# EAGLE board SCM-140-ADSR-IO (EAGLE 7.5.0)
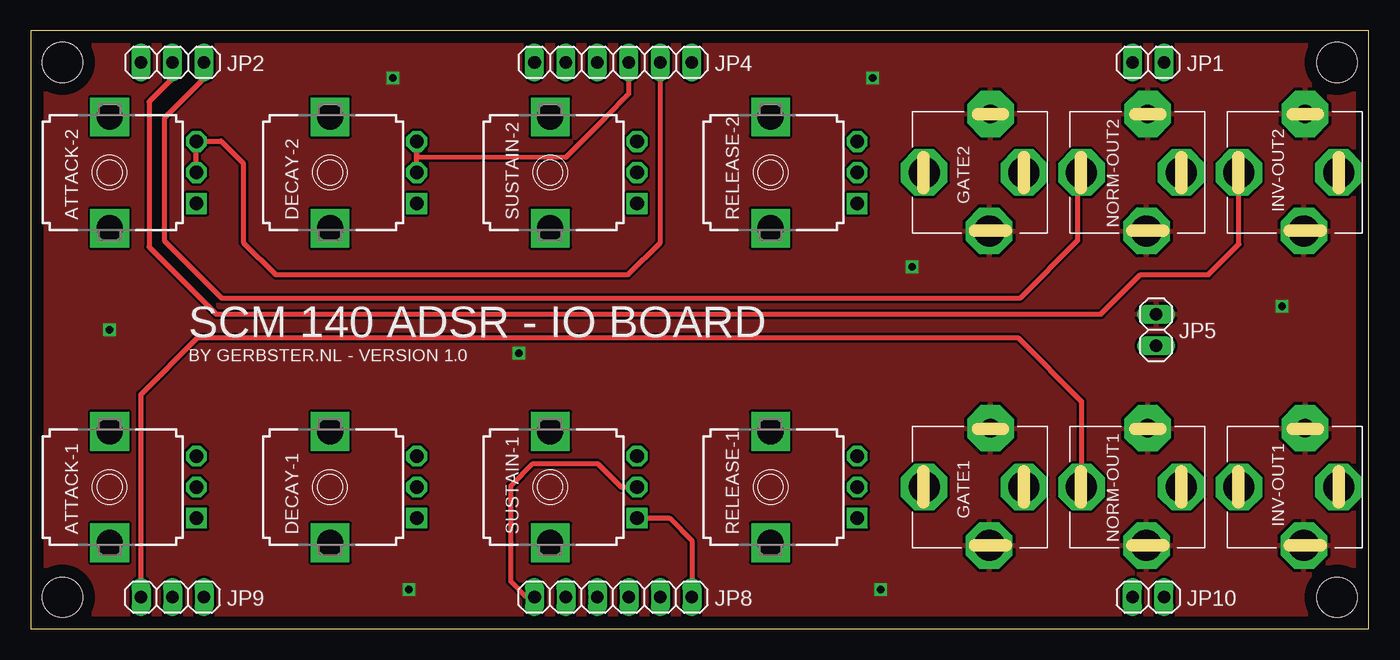
[diagram p0: board, top side]
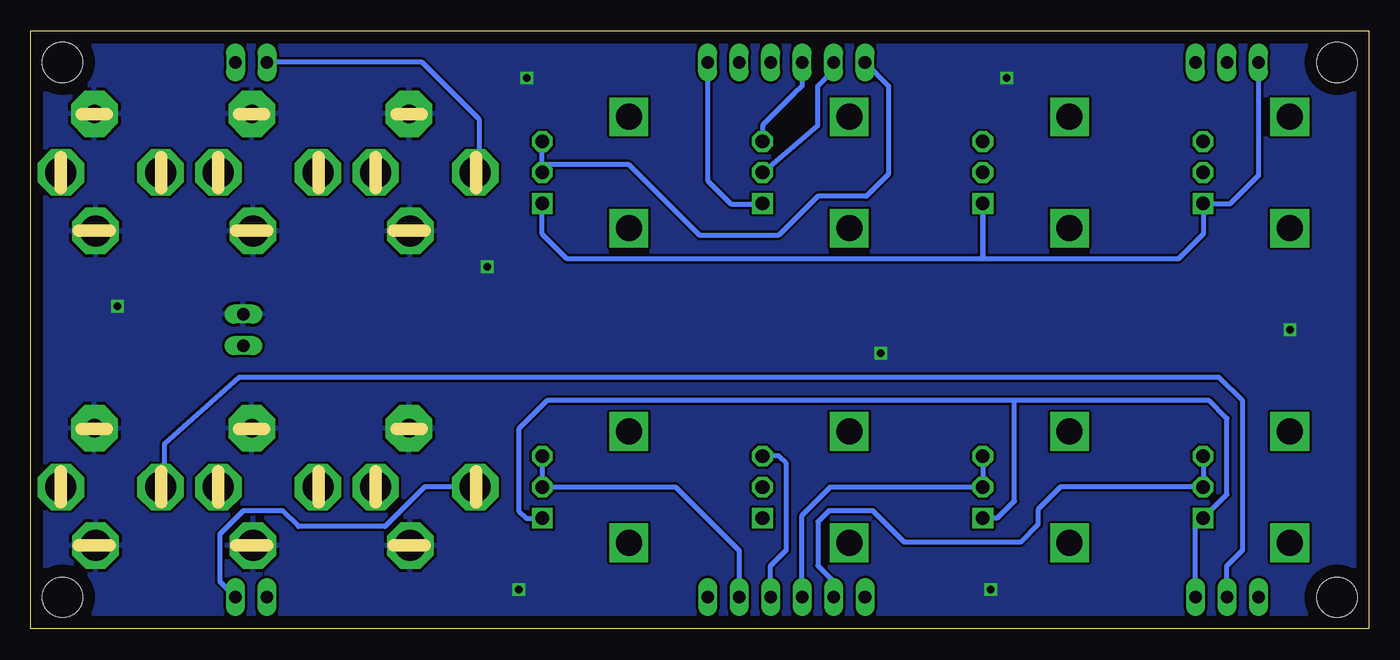
[diagram p1: board, bottom side, seen from below]

Size 107.95 x 48.26 mm. Coordinates in mm from the lower left corner, seen from the top.
Outline: 0,0 107.95,0 107.95,48.26 0,48.26 0,0
Copper layers (1*16): Top 0.035mm / dielectric 1.5mm / Bottom 0.035mm
Design rules "default": minimum track width 10mil, minimum drill 24mil, track to track 8mil, track to pad 8mil, pad to pad 8mil, via to via 8mil, smd to smd 8mil, copper to edge 40mil, drill to drill 8mil, minimum pad ring 10mil, minimum via ring 8mil, stop-mask expansion 4mil, vias tented up to drill 0mil, thermal gap 10mil
Holes 3.21 mm at 2.54,2.54 2.54,45.72 105.41,45.72 105.41,2.54

## Footprints (pad centres in the part's own frame; a part is rotated, then mirrored left to right if it is on the bottom)
EVUF = drill 1.1 pad 1.676 square: 1 -2.5,-7 | drill 1.1 pad 1.676 octagon: 2 0,-7; 3 2.5,-7 | drill 2.1 pad 2.8 square: M1 4.5,0; M2 -4.5,0
PJ301BM = drill 2.5 pad 3.75 octagon: GND1 -4.719,-0.5; SWITCH 0,-3.3; TIP 0,4.746 | drill 1.5 pad 3.75 octagon: GND2 4.746,-0.6
1X02 = drill 1.016 long: 1 -1.27,0; 2 1.27,0
1X03 = drill 1.016 long: 1 -2.54,0; 2 0,0; 3 2.54,0
1X06 = drill 1.016 long: 1 -6.35,0; 2 -3.81,0; 3 -1.27,0; 4 1.27,0; 5 3.81,0; 6 6.35,0

## Placement (x,y rotation side)
ATTACK-1  100k  [EVUF]  6.35,11.43 90 top
ATTACK-2  100k  [EVUF]  6.35,36.83 90 top
DECAY-1  1M  [EVUF]  24.13,11.43 90 top
DECAY-2  1M  [EVUF]  24.13,36.83 90 top
GATE1  Input 1  [PJ301BM]  76.83,11.43 90 top
GATE2  Input 2  [PJ301BM]  76.83,36.83 90 top
INV-OUT1  Output Inv 2  [PJ301BM]  102.23,11.43 90 top
INV-OUT2  Output Inv 2  [PJ301BM]  102.23,36.83 90 top
JP1  [1X02]  90.17,45.72 180 top
JP2  [1X03]  11.43,45.72 0 top
JP4  [1X06]  46.99,45.72 0 top
JP5  [1X02]  90.81,24.13 270 top
JP8  [1X06]  46.99,2.54 180 top
JP9  [1X03]  11.43,2.54 180 top
JP10  [1X02]  90.17,2.54 0 top
NORM-OUT1  Output 1  [PJ301BM]  89.53,11.43 90 top
NORM-OUT2  Output 2  [PJ301BM]  89.53,36.83 90 top
RELEASE-1  1M  [EVUF]  59.69,11.43 90 top
RELEASE-2  1M  [EVUF]  59.69,36.83 90 top
SUSTAIN-1  500k  [EVUF]  41.91,11.43 90 top
SUSTAIN-2  500k  [EVUF]  41.91,36.83 90 top

## Library data of the parts
ATTACK-1 ATTACK-2 DECAY-1 DECAY-2 RELEASE-1 RELEASE-2 SUSTAIN-1 SUSTAIN-2 = TomW
GATE1 GATE2 INV-OUT1 INV-OUT2 NORM-OUT1 NORM-OUT2 = gerbster
JP1 JP2 JP4 JP5 JP8-JP10 = pinhead

## Nets
+12V: JP5.2
A1-IN: ATTACK-1.2 ATTACK-1.3 JP8.5
A2-IN: ATTACK-2.2 ATTACK-2.3 JP4.5
C1-OUT: ATTACK-1.1 DECAY-1.1 JP9.1 RELEASE-1.1
C2-OUT: ATTACK-2.1 DECAY-2.1 JP2.1 RELEASE-2.1
D1-IN: DECAY-1.2 DECAY-1.3 JP8.4
D2-IN: DECAY-2.2 DECAY-2.3 JP4.4
GATE-1: GATE1.TIP JP10.2
GATE-2: GATE2.TIP JP1.2
GND: GATE1.GND1 GATE1.GND2 GATE2.GND1 GATE2.GND2 INV-OUT1.GND1 INV-OUT1.GND2 INV-OUT2.GND1 INV-OUT2.GND2 JP5.1 NORM-OUT1.GND1 NORM-OUT1.GND2 NORM-OUT2.GND1 NORM-OUT2.GND2
INV-OUT-1: INV-OUT1.TIP JP9.2
INV-OUT-2: INV-OUT2.TIP JP2.2
MANUAL-TRIGGER-1: JP10.1
MANUAL-TRIGGER-2: JP1.1
NORM-OUT-1: JP9.3 NORM-OUT1.TIP
NORM-OUT-2: JP2.3 NORM-OUT2.TIP
R1-IN: JP8.2 RELEASE-1.2 RELEASE-1.3
R2-IN: JP4.1 RELEASE-2.2 RELEASE-2.3
S1-A: JP8.3 SUSTAIN-1.3
S1-B: JP8.1 SUSTAIN-1.1
S1-W: JP8.6 SUSTAIN-1.2
S2-A: JP4.3 SUSTAIN-2.3
S2-B: JP4.6 SUSTAIN-2.1
S2-W: JP4.2 SUSTAIN-2.2

## Tracks (layer width: path | path; a pad name or v marks a point on that pad's centre or on a via)
A1-IN
  Bottom 0.406: ATTACK-1.3 ATTACK-1.2 24.87,11.43 26.67,9.63 26.67,8.4 28.09,6.99 37.47,6.99 40.01,9.53 43.55,9.53 44.45,8.63 44.45,5.08 43.18,3.81 JP8.5
A2-IN
  Top 0.406: ATTACK-2.2 ATTACK-2.3 13.34,39.33 13.34,39.37 15.35,39.37 17.14,37.57 17.14,31.19 19.76,28.57 48.18,28.57 50.8,31.19 JP4.5
C1-OUT
  Bottom 0.406: JP9.1 13.97,8.89 13.35,8.89 ATTACK-1.1 11.43,10.84 11.43,17 12.85,18.41 28.57,18.41 | 31.13,8.89 DECAY-1.1 29.96,8.93 28.57,10.31 28.57,18.41 | 28.57,18.41 66.29,18.41 68.58,16.12 68.58,9.53 67.94,8.89 66.69,8.89 RELEASE-1.1
C2-OUT
  Bottom 0.406: JP2.1 8.89,36.58 11.18,34.29 13.35,34.29 ATTACK-2.1 13.34,34.33 13.34,31.85 15.34,29.84 31.11,29.84 | 31.11,29.84 31.13,29.84 | 31.13,29.84 DECAY-2.1 31.11,34.33 31.11,29.84 | 31.13,29.84 64.67,29.84 66.69,31.87 RELEASE-2.1
D1-IN
  Bottom 0.406: DECAY-1.3 DECAY-1.2 43.43,11.43 45.72,9.14 JP8.4
D2-IN
  Top 0.406: DECAY-2.2 DECAY-2.3 31.11,39.33 31.11,38.1 43.18,38.06 46.35,41.27 48.26,43.18 JP4.4
GATE-1
  Bottom 0.406: GATE1.TIP 76.2,11.43 79.38,8.26 86.36,8.26 87.63,9.53 90.81,9.53 92.71,7.62 92.71,3.81 JP10.2
GATE-2
  Bottom 0.406: GATE2.TIP 71.75,36.83 71.75,41.1 76.38,45.72 JP1.2
GND  (via drill 0.6)
  other vias: 6.35,24.13 29.21,44.45 30.48,3.17 68.58,3.17 67.94,44.45 71.12,29.21 100.97,26.04 39.37,22.23
  pour Top: 0,48.26 0,0 107.95,0 107.95,48.26
  pour Bottom: 0,48.26 0,0 107.95,0 107.95,48.26
INV-OUT-1
  Bottom 0.406: JP9.2 11.43,5.08 10.16,6.35 10.16,18.41 12.06,20.32 91.16,20.32 97.16,14.96 97.16,11.43 INV-OUT1.TIP
INV-OUT-2
  Top 0.406: JP2.2 11.43,44.45 9.53,42.55 9.53,30.82 14.95,25.4 86.36,25.4 89.53,28.57 95.03,28.57 97.49,31.04 INV-OUT2.TIP
NORM-OUT-1
  Top 0.406: JP9.3 8.89,18.92 13.47,23.5 79.64,23.5 84.79,18.35 NORM-OUT1.TIP
NORM-OUT-2
  Top 0.406: NORM-OUT2.TIP 84.45,36.83 84.45,31.32 79.8,26.67 15.42,26.67 10.79,31.29 10.79,41.27 13.97,44.45 JP2.3
R1-IN
  Bottom 0.406: RELEASE-1.3 RELEASE-1.2 55.92,11.43 50.8,6.31 JP8.2
R2-IN
  Bottom 0.406: 66.69,37.47 RELEASE-2.3 | JP4.1 38.73,43.81 38.73,36.72 40.53,34.92 44.45,34.92 47.62,31.75 53.98,31.75 59.69,37.47 66.69,37.47 | 66.69,37.47 RELEASE-2.2
S1-A
  Bottom 0.406: JP8.3 48.26,5.08 46.99,6.35 46.99,13.34 47.62,13.97 48.91,13.97 SUSTAIN-1.3
S1-B
  Top 0.406: SUSTAIN-1.1 51.52,8.93 53.34,7.11 JP8.1
S1-W
  Top 0.406: JP8.6 40.01,2.54 38.73,3.81 38.73,11.54 40.53,13.34 45.72,13.34 47.62,11.43 SUSTAIN-1.2
S2-A
  Bottom 0.406: JP4.3 45.72,43.81 46.35,43.18 48.91,40.64 SUSTAIN-2.3
S2-B
  Bottom 0.406: JP4.6 53.34,36.2 51.44,34.29 48.91,34.29 SUSTAIN-2.1
S2-W
  Bottom 0.406: SUSTAIN-2.2 44.45,40.64 44.45,43.81 43.18,45.09 JP4.2

## Text on the board
tNames: SCM 140 ADSR - IO BOARD | BY GERBSTER.NL - VERSION 1.0